# Altium PCB PCB coco.PcbDoc
Units mil, origin at the board's own origin, x right, y up, seen from the top; angles counter-clockwise.
Board outline 6300 x 3950 mil, 3 copper layers (Top Layer, Mid-Layer 1, Bottom Layer); 51 components, 36 nets, 124 pads, 0 vias.
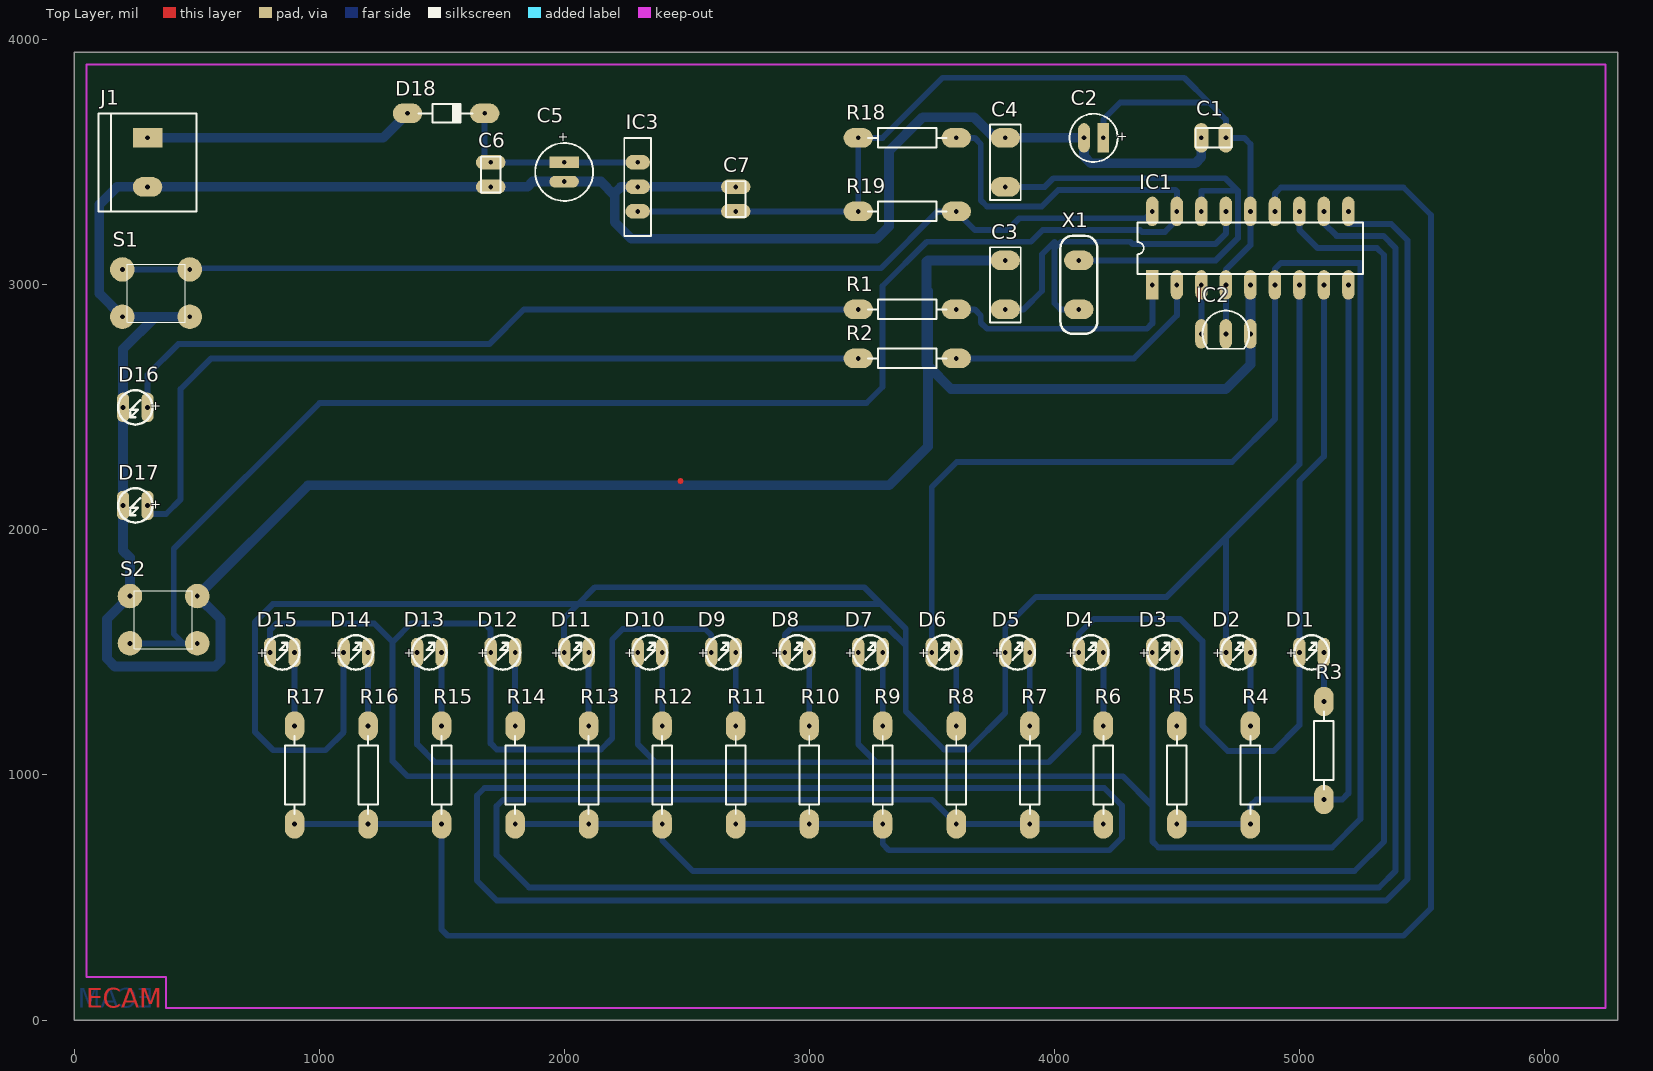
[diagram p0: Top Layer view]
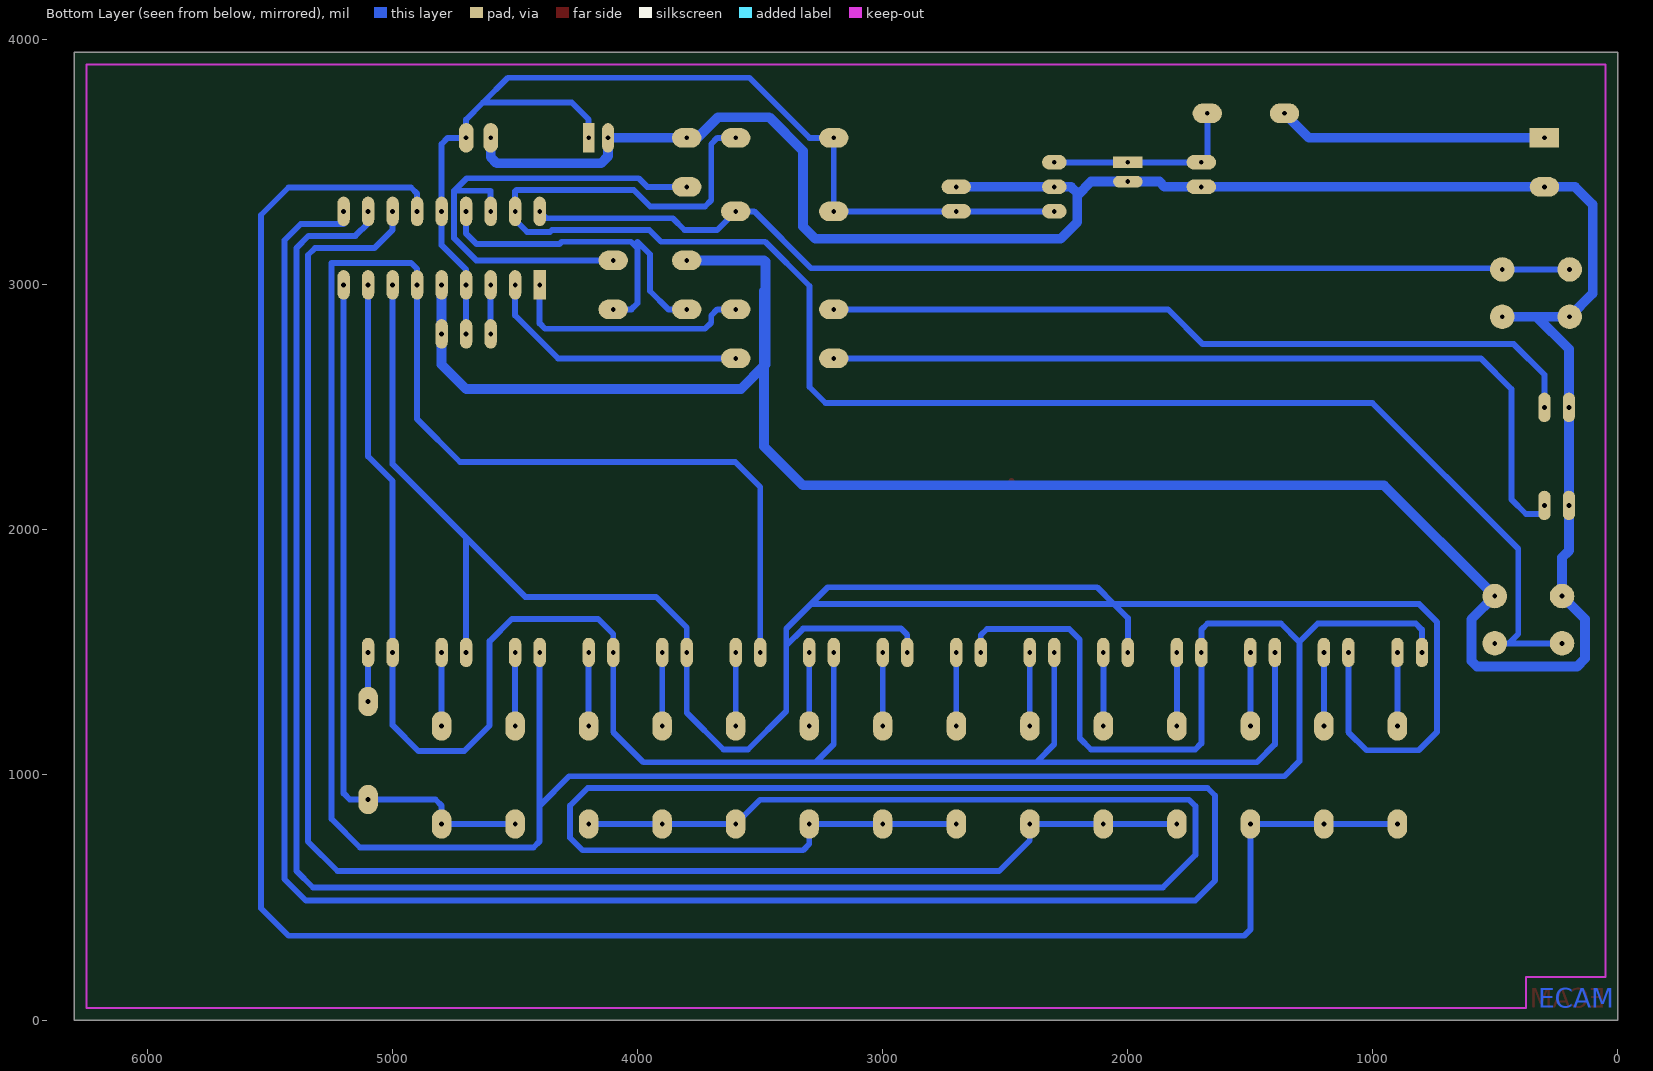
[diagram p1: Bottom Layer view, seen from below]
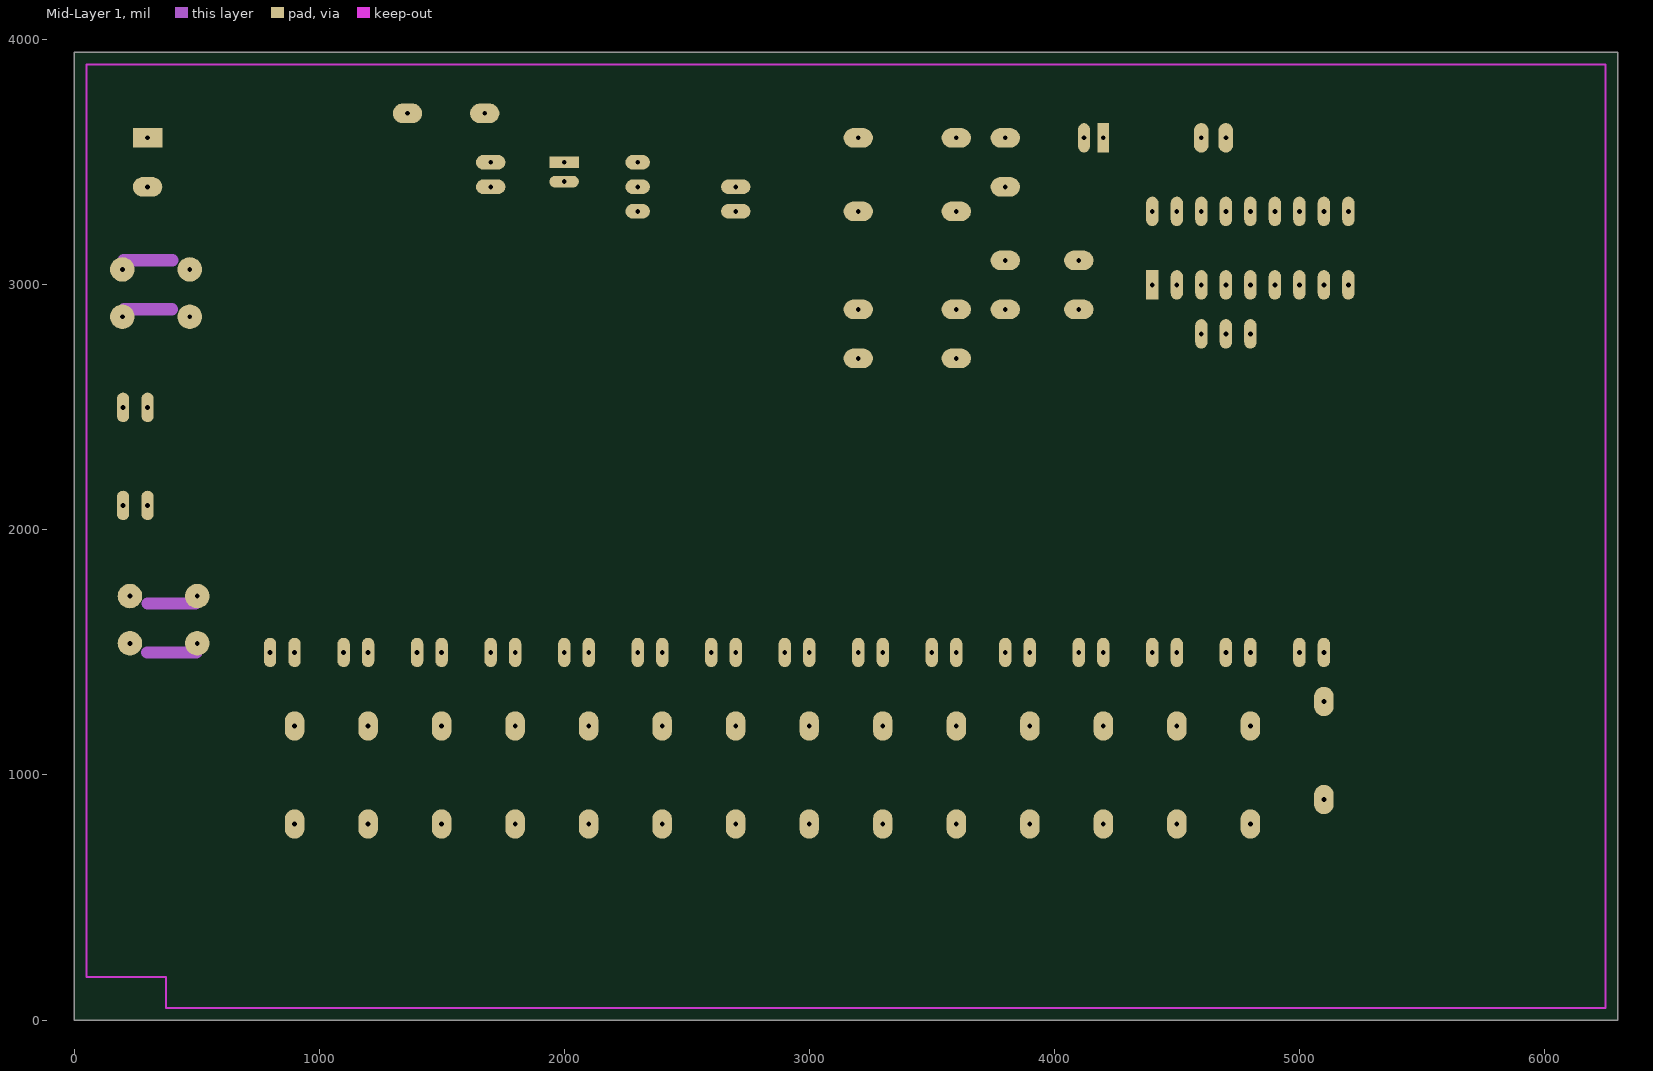
[diagram p2: Mid-Layer 1]

## Layer stack, top to bottom
Top Layer: signal copper 1.4
Dielectric: core 12.6, FR-4, Dk 4.8
Mid-Layer 1: signal copper 1.4
Dielectric: dielectric 12.6, FR-4, Dk 4.8
Bottom Layer: signal copper 1.4

## Board outline
0,0 0,3950 6300,3950 6300,0

## Design rules (kind name [scope] priority, off if disabled: settings)
Clearance "Clearance T DIP" [(IsTrack) vs (IsPad AND(
HasFootprint('DIP*')))] p1: gap=12
Clearance "Clearance PT" [(isTrack) vs (isPad)] p2: gap=24
Clearance "Clearance TT" [(isTrack) vs (isTrack)] p3: gap=24
Clearance "Clearance PP" [(IsPad) vs (IsPad)] p4: gap=24
Clearance [All] p5: gap=40
ComponentClearance [All] p1: gap=10 collisioncheckmode=0 verticalgap=10
HoleSize [All] p1: absolutevalues=TRUE maxlimit=21.65 minlimit=17.72 maxpercent=80.000 minpercent=20.000
PolygonConnect [All] p1: connectstyle=Relief reliefconductorwidth=10 reliefentries=4 polygonreliefangle="90 Angle"
RoutingCorners [All] p1: cornerstyle=45-Degree minsetback=100 maxsetback=1000
RoutingLayers [All] p1: top layer_v5=FALSE mid layer 1_v5=FALSE bottom layer_v5=TRUE
RoutingVias "ECAM Vias" [All] p1: holewidth=19.68 width=80 viastyle="Through Hole" minholewidth=17.72 minwidth=60 maxholewidth=21.65 maxwidth=120
SolderMaskExpansion [All] p1: expansion=4
TestPointUsage [All] p1: valid=0 allowmultiple=FALSE
Testpoint [All] p1: side=15 testpointundercomponent=TRUE minsize=40 maxsize=100 preferedsize=60 minholesize=0 maxholesize=40 preferedholesize=32 testpointgrid=1 style=1023 order=0123456789
Width Width_GND [InNet('GND')] p1: maxlimit=1000 minlimit=24 preferedwidth=40
Width Width_VCC [InNet('VCC')] p2: maxlimit=1000 minlimit=24 preferedwidth=40
Width [All] p3: maxlimit=1000 minlimit=16 preferedwidth=24
14 further rules are at their usual default settings.

## Components (designator, comment, footprint, x,y, rotation, side; value= is the part's Value field where it differs from the comment)
C1 "Condensateur" "CAPA 100nF" 4700,3600 r180 top
C2 "Cond pol radial" "CAPA 2.2 uF" 4200,3600 r180 top
C3 "Condensateur" "CAPA 27pF" 3800,2900 r90 top
C4 "Condensateur" "CAPA 27pF" 3800,3400 r90 top
C5 "Cond pol radial" "CAPA 100uF" 2000,3500 r270 top
C6 "Condensateur" "CAPA 100nF" 1700,3500 r270 top
C7 "Condensateur" "CAPA 100nF" 2700,3300 r90 top
D1 "LED" "Led 0.1" 5000,1500 r0 top
D2 "LED" "Led 0.1" 4700,1500 r0 top
D3 "LED" "Led 0.1" 4400,1500 r0 top
D4 "LED" "Led 0.1" 4100,1500 r0 top
D5 "LED" "Led 0.1" 3800,1500 r0 top
D6 "LED" "Led 0.1" 3500,1500 r0 top
D7 "LED" "Led 0.1" 3200,1500 r0 top
D8 "LED" "Led 0.1" 2900,1500 r0 top
D9 "LED" "Led 0.1" 2600,1500 r0 top
D10 "LED" "Led 0.1" 2300,1500 r0 top
D11 "LED" "Led 0.1" 2000,1500 r0 top
D12 "LED" "Led 0.1" 1700,1500 r0 top
D13 "LED" "Led 0.1" 1400,1500 r0 top
D14 "LED" "Led 0.1" 1100,1500 r0 top
D15 "LED" "Led 0.1" 800,1500 r0 top
D16 "LED" "Led 0.1" 300,2500 r180 top
D17 "LED" "Led 0.1" 300,2100 r180 top
D18 "Diode 1N4148" DIO7.1-3.9x1.9 1400,3700 r0 top
IC1 "PIC16F84-10/P" DIP18 4400,3000 r0 top
IC2 "" "TO-92 - Bis" 4800,2800 r270 top
IC3 "MC7805BT" "Reg 7805" 2300,3500 r270 top
J1 "Connecteur 2" CONVIS-2 300,3600 r270 top
R1 "Résistance" AXIAL-0.4 3200,2900 r0 top
R2 "Résistance" AXIAL-0.4 3200,2700 r0 top
R3 "Résistance" AXIAL-0.4 5100,1300 r270 top
R4 "Résistance" AXIAL-0.4 4800,1200 r270 top
R5 "Résistance" AXIAL-0.4 4500,1200 r270 top
R6 "Résistance" AXIAL-0.4 4200,1200 r270 top
R7 "Résistance" AXIAL-0.4 3900,1200 r270 top
R8 "Résistance" AXIAL-0.4 3600,1200 r270 top
R9 "Résistance" AXIAL-0.4 3300,1200 r270 top
R10 "Résistance" AXIAL-0.4 3000,1200 r270 top
R11 "Résistance" AXIAL-0.4 2700,1200 r270 top
R12 "Résistance" AXIAL-0.4 2400,1200 r270 top
R13 "Résistance" AXIAL-0.4 2100,1200 r270 top
R14 "Résistance" AXIAL-0.4 1800,1200 r270 top
R15 "Résistance" AXIAL-0.4 1500,1200 r270 top
R16 "Résistance" AXIAL-0.4 1200,1200 r270 top
R17 "Résistance" AXIAL-0.4 900,1200 r270 top
R18 "Résistance" AXIAL-0.4 3600,3600 r180 top
R19 "Résistance" AXIAL-0.4 3600,3300 r180 top
S1 "Bouton Poussoir D6" "BP-D6 SPST" 400,2900 r180 top
S2 "Bouton Poussoir D6" "BP-D6 SPST" 300,1700 r0 top
X1 "Quartz" Quartz_0.2V 4100,3100 r270 top

## Footprints (in the part's own frame and the unit in brackets; to place one, negate y for a bottom-side part, rotate by r counter-clockwise, add the part's x,y. Pads: shape width x height; smd on the part's side, far side on the other; paste and mask are expansions set on the pad)
AXIAL-0.4 [mil] "Resistor; 2 Leads"
  oval 120x80 hole 19.68 paste+0 mask+0: 1(0,0) 2(400,0)
  silkscreen extent 40,-40 360,40
"BP-D6 SPST" [mm] "SPST Momentary Key Switches"
  round 2.54 hole 0.5 paste+0 mask+0: 1(-1.826,0.763) 1(5.15,0.763) 2(-1.826,-4.137) 2(5.15,-4.137)
  Mid-Layer 1 lines w1.27: 5.042,-5.08 -0.038,-5.08 ; 4.978,0 0,0
  silkscreen extent -1.36,-4.69 4.7,1.31
"CAPA 2.2 uF" [mil] "Capacitor, Electrolytic, Radial; Body 5 x 6.8 mm (Dia.xH typ); Pin Spacing 2 mm (typ)"
  rect 48x120 hole 19.68 paste+0 mask+0: 1(0,0)
  oval 48x120 hole 19.68 paste+0 mask+0: 2(78.74,0)
  silkscreen extent -59,-98 138,98
"CAPA 27pF" [mil] "Capacitor, Ceramic, Thru-Hole, Dipped Radial; Body 7.8 x 3.2 mm (WxT) Pin Spacing 5.08 mm (typ)"
  oval 80x120 hole 19.68 paste+0 mask+0: 1(0,0) 2(200,0)
  silkscreen extent -54,-63 254,63
"CAPA 100nF" [mil] "Capacitor, Ceramic, Thru-Hole, Dipped Radial; Body 5.1 x 3.2 mm (WxT) Pin Spacing 2.54 mm (typ)"
  oval 60x120 hole 19.68 paste+0 mask+0: 1(0,0) 2(100,0)
  silkscreen extent -23,-39 123,40
"CAPA 100uF" [mil] "Capacitor, Electrolytic, Radial; Body 5 x 6.8 mm (Dia.xH typ); Pin Spacing 2 mm (typ)"
  rect 48x120 hole 19.68 paste+0 mask+0: 1(0,0)
  oval 48x120 hole 19.68 paste+0 mask+0: 2(78.74,0)
  silkscreen extent -79,-118 157,118
CONVIS-2 [mil] "Connecteur à vis 2 contacts Pitch 5.08"
  rect 80x120 hole 19.68 paste+0 mask+0: 1(0,0)
  oval 80x120 hole 19.68 paste+0 mask+0: 2(200,0)
  silkscreen extent -100,-200 300,200
DIO7.1-3.9x1.9 [mil] "Diode, Axial; Body 3.8 x 1.9 mm (LxDia. max), Lead Dia. 0.53 mm (max)"
  oval 120x80 hole 19.68 paste+0 mask+0: 1(-39.37,0) 2(275.59,0)
  silkscreen extent 5,-37 227,37
DIP18 [mil] "DIP; 18 Leads; Row Spacing 7.62 mm; Pitch 2.54 mm"
  rect 50x120 hole 19.68 paste+0 mask+0: 1(0,0)
  oval 50x120 hole 19.68 paste+0 mask+0: 2(100,0) 3(200,0) 4(300,0) 5(400,0) 6(500,0) 7(600,0) 8(700,0) 9(800,0) 10(800,300) 11(700,300) 12(600,300) 13(500,300) 14(400,300) 15(300,300) 16(200,300) 17(100,300) 18(0,300)
  silkscreen extent -60,45 860,255
"Led 0.1" [mil] "Led Verticale"
  oval 50x120 hole 19.68 paste+0 mask+0: 1(0,0) 2(100,0)
  silkscreen extent -20,-70 120,70
Quartz_0.2V [mil] "Quartz vertical"
  oval 80x120 hole 19.68 paste+0 mask+0: 1(0,0) 2(200,0)
  silkscreen extent -100,-75 300,75
"Reg 7805" [mil] "Inverseur miniature"
  oval 60x100 hole 19.68 paste+0 mask+0: 1(0,0) 2(100,0) 3(200,0)
  silkscreen extent -100,-55 300,55
"TO-92 - Bis" [mil] "TO, Flat Index; 3 In-Line, Axial Leads; Body Dia. 4.6mm; Leads 0.48 x 0.43 mm (max)"
  oval 120x50 hole 19.68 paste+0 mask+0: 1(0,-200) 2(0,-100) 3(0,0)
  silkscreen extent -95,-195 61,-5

## Part data
C2 C5: "Condensateur polatisé"
D18: "High Conductance Fast Diode"
IC1: "Flash/EEPROM 8-Bit Microcontroller, 1K (x14-Bit words) Flash Program Memory, 68 Bytes Data RAM, 10 MHz, 18-Pin PDIP, Standard VDD Range, Commercial Temperature"
IC2: library part SMT160, "Precision Temperature Sensor"
IC3: "3-Terminal Positive Fixed Voltage Regulator"
J1: "Connecteur"
R1 R2 R3 R4 R5 R6 R7 R8 R9 R10 R11 R12 R13 R14 R15 R16 R17 R18 R19: "Résistance standard"
S1 S2: "Bouton poussoir"

## Nets (pads, with @x,y where several pads share a name; then routed paths per layer and width w, separated by ;. In a path a pad name is that pad's centre, name@x,y a point inside that pad or via, vN(x,y) a via of type N, cw(c..) or ccw(c..) an arc to the next point about the centre after c; other vN are vias at no path point)
5V: C1.1 C2.1 C7.1 IC1.4 IC1.14 IC2.2 IC3.3 R18.2 R19.2 | length 4408.3
  Bottom Layer w24: IC3.3 C7.1 R19.2 R18.2 3299,3600 3544,3845 4530,3845 4631,3744 ; C2.1 4200,3675 4269,3744 4631,3744 ; IC2.2 IC1.4 4700,3061.83 4800,3161.83 IC1.14 4800,3575 4775,3600 C1.1 4700,3675 4631,3744
GND: C1.2 C2.2 C3.2 C4.2 C5.2 C6.2 C7.2 D16.2 D17.2 IC1.5 IC2.3 IC3.2 J1.2 S1.1 S2.1 | length 15605.6
  Mid-Layer 1 w50: S1.1@204,2900 400,2900 ; 300,1700 S2.1@496,1700
  Bottom Layer w40: S1.1@471.9,2869.96 331.96,2869.96 ; C7.2 IC3.2 2231,3400 2206,3375 2206,3365.26 ; C3.2 3484,3100 3479,3095 3479,2975 ; C1.2 4600,3521 4575,3496 4150,3496 4121.26,3524.74 C2.2 C4.2 3757,3600 3673,3684 3463,3684 3325,3546 3325,3238 3275,3188 2275,3188 2206,3257 2206,3365.26 ; IC1.5 IC2.3 4800,2675 4700,2575 3579,2575 3484,2670 ; 331.96,2869.96 197.24,2869.96 103,2964.2 103,3328 175,3400 J1.2 C6.2 1850,3400 1871.26,3421.26 C5.2 2150,3421.26 2206,3365.26 ; 331.96,2869.96 200,2738 D16.2 D17.2 200,1915 228.1,1886.9 228.1,1730.04 134,1635.94 134,1475 166,1443 575,1443 597,1465 597,1635.8 502.76,1730.04 954.71,2182 3325,2182 3484,2341 3484,2670 ; 3479,2975 3479,2675 3484,2670 ; 3479,2975 3484,2975 3484,2670
NetC3_1: C3.1 IC1.15 X1.2 | length 1578.4
  Bottom Layer w24: C3.1 3875,2900 3950,2975 3950,3125 4001,3176 4014,3163 ; X1.2 4026,2900 4001,2925 4001,3150 4014,3163 ; IC1.15 4700,3209 4657.33,3166.33 4320.12,3166.33 4310.44,3176 4027,3176 4014,3163
NetC4_1: C4.1 IC1.16 X1.1 | length 2097.9
  Bottom Layer w24: C4.1 3961,3400 3996,3435 4698,3435 4749,3384 ; X1.1 4659,3100 4749,3190 4749,3384 ; IC1.16 4600,3384 4749,3384
NetC5_1: C5.1 C6.1 D18.2 IC3.1 | length 824.4
  Bottom Layer w24: D18.2 1675.59,3500 C6.1 C5.1 IC3.1
NetD1_1: D1.1 D4.1 D7.1 D10.1 D13.1 IC1.8 | length 7745
  Bottom Layer w24: D13.1 1400,1125 1473,1052 2373,1052 ; D10.1 2300,1125 2373,1052 ; D7.1 3200,1125 3273,1052 ; IC1.8 5100,2300 5000,2200 D1.1 5000,1203 4895,1098 4708,1098 4604,1202 4604,1546 4513,1637 4162,1637 4100,1575 D4.1 4100,1175 3977,1052 3273,1052 ; 2373,1052 3273,1052
NetD1_2: D1.2 R3.1 | length 200
  Bottom Layer w24: R3.1 D1.2
NetD2_1: D2.1 D5.1 D8.1 D11.1 D14.1 IC1.7 | length 9937.5
  Bottom Layer w24: D14.1 1100,1175 1026,1101 813,1101 739,1175 739,1625 811,1697 2056,1697 ; D11.1 2000,1641 2056,1697 ; D8.1 2900,1572 2925,1597 3325,1597 3394,1528 ; D2.1 4700,1968 ; IC1.7 5000,2268 4700,1968 ; 2056,1697 3294,1697 ; 2056,1697 2125,1766 3225,1766 3294,1697 ; 3294,1697 3394,1597 3394,1528 ; 3394,1528 3394,1260 3550,1104 3650,1104 3800,1254 D5.1 3800,1602 3925,1727 4459,1727 4700,1968
NetD2_2: D2.2 R4.1 | length 300
  Bottom Layer w24: R4.1 D2.2
NetD3_1: D3.1 D6.1 D9.1 D12.1 D15.1 IC1.6 | length 13743.5
  Bottom Layer w24: D15.1 800,1593 825,1618 1225,1618 1300,1543 ; D9.1 2600,1571 2575,1596 2239,1596 2196,1553 2196,1150 2150,1104 1725,1104 1700,1129 D12.1 1700,1593 1675,1618 1375,1618 1300,1543 ; D6.1 3500,2175 3602,2277 4725,2277 4900,2452 IC1.6 4900,3064.84 4925,3089.84 5249,3089.84 5249,820.08 5132.92,704 4425,704 4400,729 4400,875 ; D3.1 4400,875 ; 1300,1543 1300,1056 1361,995 4280,995 4400,875
NetD3_2: D3.2 R5.1 | length 300
  Bottom Layer w24: R5.1 D3.2
NetD4_2: D4.2 R6.1 | length 300
  Bottom Layer w24: R6.1 D4.2
NetD5_2: D5.2 R7.1 | length 300
  Bottom Layer w24: R7.1 D5.2
NetD6_2: D6.2 R8.1 | length 300
  Bottom Layer w24: R8.1 D6.2
NetD7_2: D7.2 R9.1 | length 300
  Bottom Layer w24: R9.1 D7.2
NetD8_2: D8.2 R10.1 | length 300
  Bottom Layer w24: R10.1 D8.2
NetD9_2: D9.2 R11.1 | length 300
  Bottom Layer w24: R11.1 D9.2
NetD10_2: D10.2 R12.1 | length 300
  Bottom Layer w24: R12.1 D10.2
NetD11_2: D11.2 R13.1 | length 300
  Bottom Layer w24: R13.1 D11.2
NetD12_2: D12.2 R14.1 | length 300
  Bottom Layer w24: R14.1 D12.2
NetD13_2: D13.2 R15.1 | length 300
  Bottom Layer w24: R15.1 D13.2
NetD14_2: D14.2 R16.1 | length 300
  Bottom Layer w24: R16.1 D14.2
NetD15_2: D15.2 R17.1 | length 300
  Bottom Layer w24: R17.1 D15.2
NetD16_1: D16.1 R1.1 | length 3143.6
  Bottom Layer w24: D16.1 300,2633 425,2758 1694,2758 1836,2900 R1.1
NetD17_1: D17.1 R2.1 | length 3461.6
  Bottom Layer w24: D17.1 300,2065 375,2065 435,2125 435,2575 560,2700 R2.1
NetIC1_1: IC1.1 R1.2 | length 1015.8
  Bottom Layer w24: R1.2 3675,2900 3700,2875 3700,2846 3725,2821 4378,2821 4400,2843 IC1.1
NetIC1_2: IC1.2 R2.2 | length 1097.5
  Bottom Layer w24: R2.2 4325,2700 4500,2875 IC1.2
NetIC1_3: IC1.3 IC2.1 | length 200
  Bottom Layer w24: IC2.1 IC1.3
NetIC1_9: IC1.9 R3.2 R4.2 R5.2 | length 2870.7
  Bottom Layer w24: R5.2 R4.2 4800,875 4825,900 R3.2 5175,900 5200,925 IC1.9
NetIC1_10: IC1.10 R9.2 R10.2 R11.2 | length 11636.1
  Bottom Layer w24: R11.2 R10.2 R9.2 3300,718 3325,693 4225,693 4276,744 4276,875 4204,947 1675,947 1644,916 1644,569 1725,488 5354,488 5441,575 5441,3182 5375,3248 5200,3248 IC1.10
NetIC1_11: IC1.11 R6.2 R7.2 R8.2 | length 9403.3
  Bottom Layer w24: R6.2 R7.2 R8.2 3501,899 1750,899 1724,873 1724,674 1857,541 5325,541 5393,609 5393,3150 5343,3200 5152,3200 5100,3252 IC1.11
NetIC1_12: IC1.12 R12.2 R13.2 R14.2 | length 6570.1
  Bottom Layer w24: R14.2 R13.2 R12.2 2400,733 2525,608 5225,608 5345,728 5345,3122 5317,3150 5075,3150 5000,3225 IC1.12
NetIC1_13: IC1.13 R15.2 R16.2 R17.2 | length 8719.5
  Bottom Layer w24: R17.2 R16.2 R15.2 1500,369 1525,344 5425,344 5537,456 5537,3285 5425,3397 4925,3397 4900,3372 IC1.13
NetIC1_17: IC1.17 R18.1 S2.2 | length 7128.6
  Mid-Layer 1 w50: 298.5,1500 S2.2@498.5,1500
  Bottom Layer w24: S2.2@228.1,1537.13 228.23,1537 502.63,1537 502.76,1537.13 444.87,1537.13 407,1575 407,1923 1002,2518 3234,2518 3299,2583 3299,2995 3480,3176 3905,3176 3953,3224 4350,3224 4358,3216 4451,3216 4500,3265 IC1.17 4500,3382 4495,3387 4016,3387 3949,3320 3725,3320 3700,3345 3700,3575 3675,3600 R18.1
NetIC1_18: IC1.18 R19.1 S1.2 | length 4364.7
  Bottom Layer w24: S1.2@197.24,3062.87 198.11,3062 471.03,3062 471.9,3062.87 477.03,3068 3293,3068 3525,3300 R19.1 3676,3224 3808.96,3224 3856.96,3272 4372,3272 IC1.18
VCC: D18.1 J1.1 | length 1102.1
  Bottom Layer w40: J1.1 1260.63,3600 D18.1
copper on no net: | length 0

## Keep-outs
Keep-Out Layer:
  lines w8: 50,175 50,3900 6250,3900 6250,50 375,50 375,175 50,175

## Other copper
Top Layer:
  text "ECAM" at 50,50 h78.74
  text ".GTL" at 7764,-1528 h90
Bottom Layer:
  text "ECAM" at 325,50 h78.74
  text ".GBL" at 7764,-1528 h90
Multi-Layer:

## Silkscreen, mask and mechanical layers (free items; w line width, h text height)
Top Overlay:
  text ".GTO" at 7764,-1528 h90
Top Paste:
  text ".GTP" at 7764,-1528 h90
Bottom Paste:
  text ".GBP" at 7764,-1528 h90
Top Solder:
  text ".GTS" at 7764,-1528 h90
Bottom Solder:
  text ".GBS" at 7764,-1528 h90
Mechanical 1:
  the board outline again, w7.87
Mechanical 16:
  circle w3.94: c6670,-1515 r55.12
  lines w5: -2175,-225 -1975,-225 ; -2175,1675 -1975,1675 ; -2175,3575 -1975,3575 ; 305,-2125 305,-1925 ; 305,5275 305,5475 ; 3180,-2125 3180,-1925 ; 3180,5275 3180,5475 ; 3815,-1625 8315,-1625 ; 3815,-1325 8315,-1325 ; 3815,-1025 5315,-1025 ; 5315,-1925 5315,-1325 5315,-725 ; 6055,-2125 6055,-1925 ; 6055,5275 6055,5475 ; 7415,-1925 7415,-1325 ; 8315,-235 8515,-235 ; 8315,1665 8515,1665 ; 8315,3565 8515,3565 ; 3815,-1925 3815,-725 ; 3815,-1925 8315,-1925 ; 3815,-1925 2415,-1925 2415,-725 3815,-725 ; 3815,-725 5315,-725 ; 5315,-725 8315,-725 8315,-1925 ; 8315,-1925 -1975,-1925 -1975,5275 8315,5275 8315,-1925 ; -2175,-2125 8515,-2125 8515,5475 -2175,5475 -2175,-2125
  text "1" at -1143,5340 h70
  text "2" at 1717,5340 h70
  text "3" at 4597,5340 h70
  text "4" at 7467,5340 h70
  text "A" at -2100,4434 h70
  text "A" at 8390,4424 h70
  text "B" at -2100,2542 h70
  text "B" at 8390,2532 h70
  text "C" at -2100,632 h70
  text "C" at 6340,497 h70
  text "Concepteur du circuit :" at 3865,-825 h45
  text "TITRE :" at 5365,-825 h45
  text "Votre Nom" at 4240,-975 h80
  text "Le nom du circuit" at 5625,-1095 h100
  text "Concepteur du PCB :" at 3865,-1120 h45
  text "ECAM" at 2650,-1135 h240
  text "D" at -2100,-1258 h70
  text "D" at 8390,-1268 h70
  text "Votre Nom" at 4235,-1280 h80
  text "Prom. de l'Alma 50" at 2720,-1405 h60
  text "Date :" at 3865,-1425 h45
  text "PART NO.:" at 5365,-1425 h45
  text "Layer :" at 7465,-1425 h45
  text ".Print_Date" at 4255,-1460 h70
  text "1" at 5370,-1545 h60
  text "C" at 6645,-1545 h60
  text "ECAM" at 6751,-1560 h100
  text ".Print_Time" at 4260,-1590 h70
  text "1200 Bruxelles" at 2720,-1625 h60
  text "Nom du fichier :" at 3865,-1725 h45
  text "DWG NO:" at 5365,-1725 h45
  text ".Print_Scale" at 7625,-1805 h40
  text ".Printout_Name" at 5515,-1840 h60
  text ".Pcb_File_Name_No_Path" at 3915,-1845 h70
  text "1" at -1143,-2060 h70
  text "2" at 1717,-2060 h70
  text "3" at 4597,-2060 h70
  text "4" at 7467,-2060 h70

## Text inside footprints (layer, text, board x,y; h text height)
C2: Top Overlay "+" at 4300.63,3620 h39.37 r180
C5: Top Overlay "+" at 1980,3625 h39.37 r270
D1: Top Overlay "+" at 4945,1480 h39.37
D2: Top Overlay "+" at 4645,1480 h39.37
D3: Top Overlay "+" at 4345,1480 h39.37
D4: Top Overlay "+" at 4045,1480 h39.37
D5: Top Overlay "+" at 3745,1480 h39.37
D6: Top Overlay "+" at 3445,1480 h39.37
D7: Top Overlay "+" at 3145,1480 h39.37
D8: Top Overlay "+" at 2845,1480 h39.37
D9: Top Overlay "+" at 2545,1480 h39.37
D10: Top Overlay "+" at 2245,1480 h39.37
D11: Top Overlay "+" at 1945,1480 h39.37
D12: Top Overlay "+" at 1645,1480 h39.37
D13: Top Overlay "+" at 1345,1480 h39.37
D14: Top Overlay "+" at 1045,1480 h39.37
D15: Top Overlay "+" at 745,1480 h39.37
D16: Top Overlay "+" at 355,2520 h39.37 r180
D17: Top Overlay "+" at 355,2120 h39.37 r180